# Altium PCB PCB.PcbDoc
Units mm, origin at the board's own origin, x right, y up, seen from the top; angles counter-clockwise.
Board outline 91.28 x 24.62 mm, 2 copper layers (Top Layer, Bottom Layer), stack 1.671 mm thick; 2 components, 67 nets, 174 pads, 0 vias.
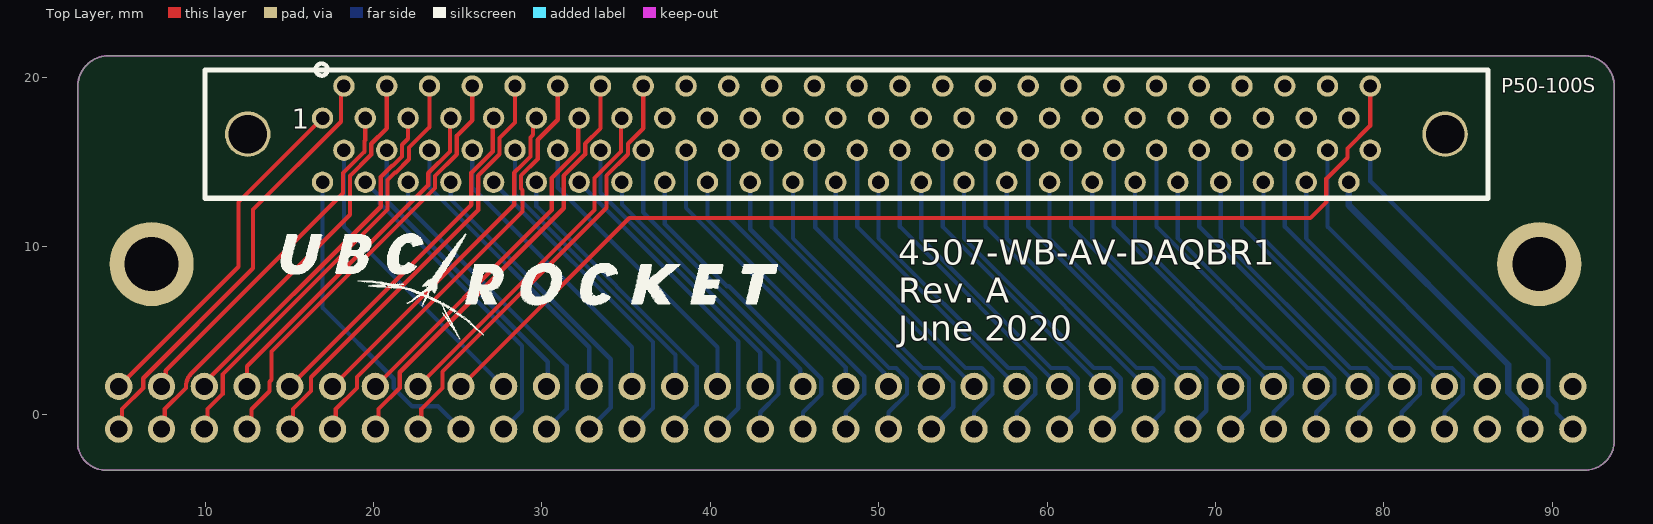
[diagram p0: Top Layer view]
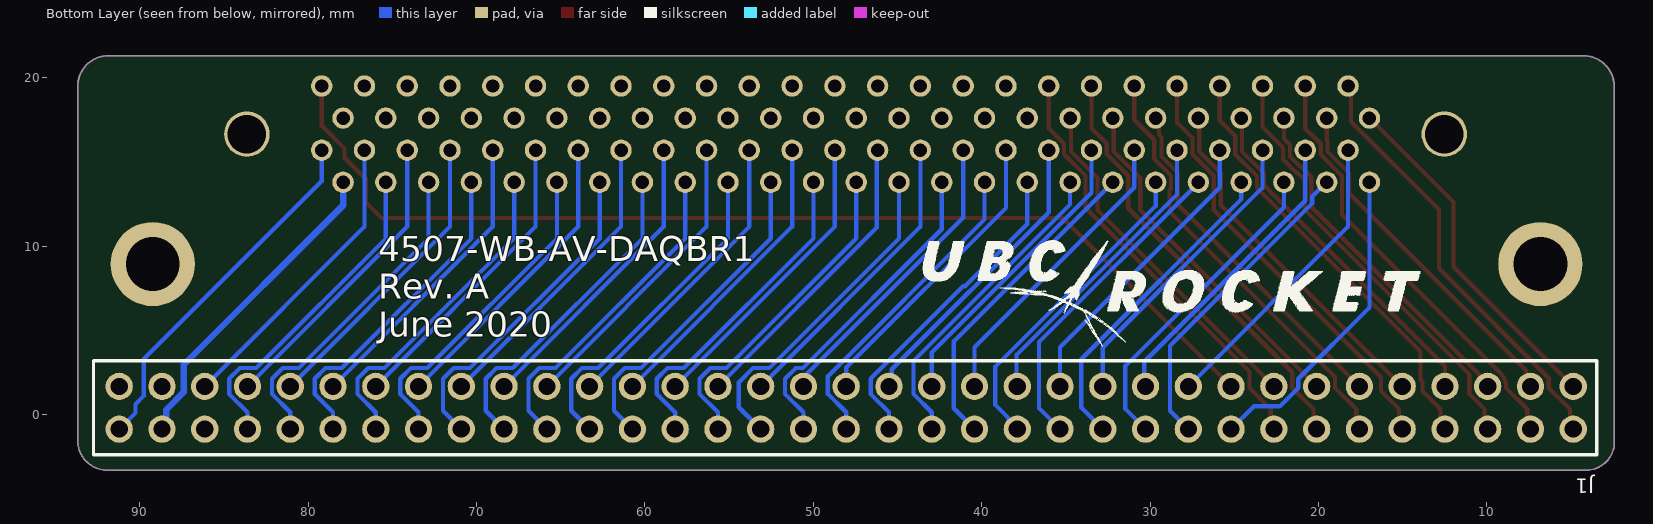
[diagram p1: Bottom Layer view, seen from below]

## Layer stack, top to bottom
Top Solder: solder mask 0.0102, Solder Resist, Dk 3.5
Top Layer: signal copper 0.0356
Dielectric 1: dielectric 1.6, FR-4, Dk 4.8
Bottom Layer: signal copper 0.0356
Bottom Solder: solder mask 0.0102, Solder Resist, Dk 3.5

## Board outline
4.094,-3.293 91.937,-3.293 ccw(c91.937,-1.532) 93.698,-1.532 93.698,19.484 ccw(c91.855,19.484) 91.855,21.327 4.28,21.327 ccw(c4.28,19.469) 2.422,19.469 2.422,-1.621 ccw(c4.094,-1.621)

## Design rules (kind name [scope] priority, off if disabled: settings)
Clearance [All] p1: gap=0.152 ignorepadtopadclearanceinfootprint=FALSE except(0: Arc-Hole Track-Hole SMDPad-Hole THPad-Hole Via-Hole Fill-Hole Poly-Hole Region-Hole Text-Hole)
ComponentClearance [All] p1: gap=0 collisioncheckmode=3 verticalgap=0.003 showdistances=FALSE
HoleSize [All] p1: absolutevalues=TRUE maxlimit=25.4 minlimit=0.025 maxpercent=80.000 minpercent=20.000
MinimumSolderMaskSliver [All] p1: minsoldermaskwidth=0.025
PolygonConnect [All] p1: connectstyle=Direct reliefconductorwidth=0.254 reliefentries=4 polygonreliefangle="90 Angle" airgapwidth=0.254
RoomDefinition BMS_REV_A1 [InComponentClass('BMS_REV_A1')] p1: confinementstyle=ConfineIn formatcopy=TRUE lockcomponents=FALSE outline -54.699,-63.136 47.701,-63.136 47.701,5.363 -54.699,5.363
RoutingVias [All] p1: holewidth=0.2 width=0.505 viastyle="Through Hole" minholewidth=0.2 minwidth=0.505 maxholewidth=0.711 maxwidth=1.27
SilkToSilkClearance [All] p1: silktosilkclearance=0.025
SilkToSolderMaskClearance [IsPad] p1: minsilkscreentomaskgap=0.025 clearancetoexposedcopper=TRUE
SolderMaskExpansion [All] p1: expansion=0.102 istentingtop=FALSE
Width [All] p1: maxlimit=5.08 minlimit=0.254 preferedwidth=0.305
25 further rules are at their usual default settings.

## Components (designator, comment, footprint, x,y, rotation, side; value= is the part's Value field where it differs from the comment)
J1 "SAMTEC-HTSW-135-07-X-DJ" HTSW-135-07-G-D 48.047,0.411 r0 bottom locked
P50-100S "P50-100S" P50-100S-R1-EA 48.086,16.663 r0 top locked

## Footprints (in the part's own frame and the unit in brackets; to place one, negate y for a bottom-side part, rotate by r counter-clockwise, add the part's x,y. Pads: shape width x height; smd on the part's side, far side on the other; paste and mask are expansions set on the pad)
HTSW-135-07-G-D [mm]
  round 1.62 hole 1.02: 1(-43.18,-1.27) 2(-43.18,1.27) 3(-40.64,-1.27) 4(-40.64,1.27) 5(-38.1,-1.27) 6(-38.1,1.27) 7(-35.56,-1.27) 8(-35.56,1.27) 9(-33.02,-1.27) 10(-33.02,1.27) 11(-30.48,-1.27) 12(-30.48,1.27) 13(-27.94,-1.27) 14(-27.94,1.27) 15(-25.4,-1.27) 16(-25.4,1.27) 17(-22.86,-1.27) 18(-22.86,1.27) 19(-20.32,-1.27) 20(-20.32,1.27) 21(-17.78,-1.27) 22(-17.78,1.27) 23(-15.24,-1.27) 24(-15.24,1.27) 25(-12.7,-1.27) 26(-12.7,1.27) 27(-10.16,-1.27) 28(-10.16,1.27) 29(-7.62,-1.27) 30(-7.62,1.27) 31(-5.08,-1.27) 32(-5.08,1.27) 33(-2.54,-1.27) 34(-2.54,1.27) 35(0,-1.27) 36(0,1.27) 37(2.54,-1.27) 38(2.54,1.27) 39(5.08,-1.27) 40(5.08,1.27) 41(7.62,-1.27) 42(7.62,1.27) 43(10.16,-1.27) 44(10.16,1.27) 45(12.7,-1.27) 46(12.7,1.27) 47(15.24,-1.27) 48(15.24,1.27) 49(17.78,-1.27) 50(17.78,1.27) 51(20.32,-1.27) 52(20.32,1.27) 53(22.86,-1.27) 54(22.86,1.27) 55(25.4,-1.27) 56(25.4,1.27) 57(27.94,-1.27) 58(27.94,1.27) 59(30.48,-1.27) 60(30.48,1.27) 61(33.02,-1.27) 62(33.02,1.27) 63(35.56,-1.27) 64(35.56,1.27) 65(38.1,-1.27) 66(38.1,1.27) 67(40.64,-1.27) 68(40.64,1.27) 69(43.18,-1.27) 70(43.18,1.27)
  silkscreen extent -44.58,-2.79 44.7,2.79, body extent -44.58,-2.51 44.32,2.51, height 7.89
P50-100S-R1-EA [mm]
  round 1.27 hole 0.8: 1(-31.115,0.953) 2(-29.845,2.858) 3(-28.575,0.953) 4(-27.305,2.858) 5(-26.035,0.953) 6(-24.765,2.858) 7(-23.495,0.953) 8(-22.225,2.858) 9(-20.955,0.953) 10(-19.685,2.858) 11(-18.415,0.953) 12(-17.145,2.858) 13(-15.875,0.953) 14(-14.605,2.858) 15(-13.335,0.953) 16(-12.065,2.858) 17(-10.795,0.953) 18(-9.525,2.858) 19(-8.255,0.953) 20(-6.985,2.858) 21(-5.715,0.953) 22(-4.445,2.858) 23(-3.175,0.953) 24(-1.905,2.858) 25(-0.635,0.953) 26(0.635,2.858) 27(1.905,0.953) 28(3.175,2.858) 29(4.445,0.953) 30(5.715,2.858) 31(6.985,0.953) 32(8.255,2.858) 33(9.525,0.953) 34(10.795,2.858) 35(12.065,0.953) 36(13.335,2.858) 37(14.605,0.953) 38(15.875,2.858) 39(17.145,0.953) 40(18.415,2.858) 41(19.685,0.953) 42(20.955,2.858) 43(22.225,0.953) 44(23.495,2.858) 45(24.765,0.953) 46(26.035,2.858) 47(27.305,0.953) 48(28.575,2.858) 49(29.845,0.953) 50(31.115,2.858) 51(-31.115,-2.857) 52(-29.845,-0.952) 53(-28.575,-2.857) 54(-27.305,-0.952) 55(-26.035,-2.857) 56(-24.765,-0.952) 57(-23.495,-2.857) 58(-22.225,-0.952) 59(-20.955,-2.857) 60(-19.685,-0.952) 61(-18.415,-2.857) 62(-17.145,-0.952) 63(-15.875,-2.857) 64(-14.605,-0.952) 65(-13.335,-2.857) 66(-12.065,-0.952) 67(-10.795,-2.857) 68(-9.525,-0.952) 69(-8.255,-2.857) 70(-6.985,-0.952) 71(-5.715,-2.857) 72(-4.445,-0.952) 73(-3.175,-2.857) 74(-1.905,-0.952) 75(-0.635,-2.857) 76(0.635,-0.952) 77(1.905,-2.857) 78(3.175,-0.952) 79(4.445,-2.857) 80(5.715,-0.952) 81(6.985,-2.857) 82(8.255,-0.952) 83(9.525,-2.857) 84(10.795,-0.952) 85(12.065,-2.857) 86(13.335,-0.952) 87(14.605,-2.857) 88(15.875,-0.952) 89(17.145,-2.857) 90(18.415,-0.952) 91(19.685,-2.857) 92(20.955,-0.952) 93(22.225,-2.857) 94(23.495,-0.952) 95(24.765,-2.857) 96(26.035,-0.952) 97(27.305,-2.857) 98(28.575,-0.952) 99(29.845,-2.857) 100(31.115,-0.952)
  round 2.7 hole 2.3: ""(-35.56,0) ""(35.56,0)
  silkscreen extent -38.1,-3.81 38.1,4.19, body extent -37.93,-3.5 38.3,3.5, height 10.71

## Free pads (board coordinates)
  round 5 hole 3.2: ""(6.817,8.948) ""(89.235,8.948)

## Nets (pads, with @x,y where several pads share a name; then routed paths per layer and width w, separated by ;. In a path a pad name is that pad's centre, name@x,y a point inside that pad or via, vN(x,y) a via of type N, cw(c..) or ccw(c..) an arc to the next point about the centre after c; other vN are vias at no path point)
+5V: J1.68 P50-100S.99 | length 19.1
  Bottom Layer w0.381: P50-100S.99 77.931,12.428 87.385,2.974 87.385,1.342 88.426,0.301 88.426,-0.598 J1.68
"Analog Ground 1": J1.2 P50-100S.2 | length 25.9
  Top Layer w0.254: J1.2 5.059,-0.667 5.059,0.332 6.318,1.591 6.318,2.168 12.844,8.695 12.844,12.182 18.065,17.403 18.065,19.345 P50-100S.2
"Analog Ground 2": J1.4 P50-100S.4 | length 25.9
  Top Layer w0.254: J1.4 7.599,-0.667 7.599,0.332 8.858,1.591 8.858,1.784 8.863,1.79 cw(c9.947,1.681) 9.177,2.451 18.596,11.871 18.596,14.185 19.866,15.455 19.866,16.09 20.781,17.004 P50-100S.4
"Analog Ground 3": J1.6 P50-100S.6 | length 25.9
  Top Layer w0.254: J1.6 10.139,-0.667 10.139,0.332 11.036,1.23 11.036,2.388 20.831,12.183 20.831,13.942 21.28,14.39 21.328,14.39 22.111,15.174 22.111,15.87 23.321,17.08 P50-100S.6
"Analog Ground 4": J1.8 P50-100S.8 | length 25.9
  Top Layer w0.254: J1.8 12.748,-0.598 12.748,0.327 13.816,1.394 13.816,1.949 13.938,2.071 13.938,3.754 23.647,13.463 23.647,14.17 24.946,15.469 24.946,16.566 25.861,17.481 P50-100S.8
"Analog Ground 5": J1.10 P50-100S.10 | length 25.9
  Top Layer w0.254: J1.10 15.219,-0.667 15.219,0.332 16.287,1.4 16.287,2.228 26.216,12.157 26.216,14.199 27.486,15.469 27.486,16.436 28.401,17.351 P50-100S.10
"Analog Ground 6": J1.12 P50-100S.12 | length 26
  Top Layer w0.254: J1.12 17.759,-0.667 17.759,0.332 19.018,1.591 19.018,2.233 28.848,12.064 28.848,13.335 28.756,13.427 28.756,14.199 29.75,15.193 29.75,16.327 30.941,17.518 P50-100S.12
"Analog Ground 7": J1.14 P50-100S.14 | length 25.9
  Top Layer w0.254: J1.14 20.299,-0.667 20.299,0.332 21.558,1.591 21.558,2.522 31.296,12.261 31.296,14.199 32.566,15.469 32.566,16.09 33.481,17.004 P50-100S.14
"Analog Ground 8": J1.16 P50-100S.16 | length 25.9
  Top Layer w0.254: J1.16 22.839,-0.667 22.839,0.332 24.098,1.591 24.098,2.557 33.836,12.295 33.836,14.199 35.106,15.469 35.106,16.09 36.021,17.004 P50-100S.16
"Digital Ground 1": J1.17 P50-100S.50 | length 63.9
  Top Layer w0.254: J1.17 35.183,11.677 75.641,11.677 76.59,12.626 76.59,14.013 77.842,15.265 77.842,15.809 79.201,17.168 P50-100S.50
"Digital Ground 2": J1.70 P50-100S.100 | length 21.6
  Bottom Layer w0.254: P50-100S.100 79.201,13.872 89.776,3.297 89.776,1.108 90.262,0.622 90.262,0.106 J1.70
"FIRSTPORTA Bit 0": J1.49 P50-100S.82 | length 18
  Bottom Layer w0.254: P50-100S.82 56.341,11.167 J1.49
"FIRSTPORTA Bit 1": J1.48 P50-100S.81 | length 19.5
  Bottom Layer w0.254: P50-100S.81 55.071,10.472 62.772,2.77 63.738,2.77 64.376,2.132 64.376,0.23 J1.48
"FIRSTPORTA Bit 2": J1.47 P50-100S.80 | length 18
  Bottom Layer w0.254: P50-100S.80 53.801,11.167 J1.47
"FIRSTPORTA Bit 3": J1.46 P50-100S.79 | length 19.5
  Bottom Layer w0.254: P50-100S.79 52.531,10.472 60.232,2.77 61.198,2.77 61.836,2.132 61.836,0.23 J1.46
"FIRSTPORTA Bit 4": J1.45 P50-100S.78 | length 18
  Bottom Layer w0.254: P50-100S.78 51.261,11.167 J1.45
"FIRSTPORTA Bit 5": J1.44 P50-100S.77 | length 19.5
  Bottom Layer w0.254: P50-100S.77 49.991,10.472 57.692,2.77 58.658,2.77 59.296,2.132 59.296,1.23 58.207,0.14 J1.44
"FIRSTPORTA Bit 6": J1.43 P50-100S.76 | length 18
  Bottom Layer w0.254: P50-100S.76 48.721,11.167 J1.43
"FIRSTPORTA Bit 7": J1.42 P50-100S.75 | length 19.5
  Bottom Layer w0.254: P50-100S.75 47.451,10.472 55.152,2.77 56.118,2.77 56.756,2.132 56.756,1.23 55.667,0.14 J1.42
"FIRSTPORTB Bit 0": J1.57 P50-100S.90 | length 18
  Bottom Layer w0.254: P50-100S.90 66.501,11.167 J1.57
"FIRSTPORTB Bit 1": J1.56 P50-100S.89 | length 19.5
  Bottom Layer w0.254: P50-100S.89 65.231,10.472 72.932,2.77 73.898,2.77 74.536,2.132 74.536,1.23 73.447,0.14 J1.56
"FIRSTPORTB Bit 2": J1.55 P50-100S.88 | length 18
  Bottom Layer w0.254: P50-100S.88 63.961,11.167 J1.55
"FIRSTPORTB Bit 3": J1.54 P50-100S.87 | length 19.5
  Bottom Layer w0.254: P50-100S.87 62.691,10.472 70.392,2.77 71.358,2.77 71.996,2.132 71.996,0.23 J1.54
"FIRSTPORTB Bit 4": J1.53 P50-100S.86 | length 18
  Bottom Layer w0.254: P50-100S.86 61.421,11.167 J1.53
"FIRSTPORTB Bit 5": J1.52 P50-100S.85 | length 19.5
  Bottom Layer w0.254: P50-100S.85 60.151,10.472 67.852,2.77 68.818,2.77 69.456,2.132 69.456,0.23 J1.52
"FIRSTPORTB Bit 6": J1.51 P50-100S.84 | length 18
  Bottom Layer w0.254: P50-100S.84 58.881,11.167 J1.51
"FIRSTPORTB Bit 7": J1.50 P50-100S.83 | length 19.5
  Bottom Layer w0.254: P50-100S.83 57.611,10.472 65.312,2.77 66.278,2.77 66.916,2.132 66.916,0.23 J1.50
"FIRSTPORTC Bit 0": J1.65 P50-100S.98 | length 18
  Bottom Layer w0.254: P50-100S.98 76.661,11.167 J1.65
"FIRSTPORTC Bit 1": J1.64 P50-100S.97 | length 19.5
  Bottom Layer w0.254: P50-100S.97 75.391,10.472 83.092,2.77 84.058,2.77 84.696,2.132 84.696,1.23 83.607,0.14 J1.64
"FIRSTPORTC Bit 2": J1.63 P50-100S.96 | length 18
  Bottom Layer w0.254: P50-100S.96 74.121,11.167 J1.63
"FIRSTPORTC Bit 3": J1.62 P50-100S.95 | length 19.5
  Bottom Layer w0.254: P50-100S.95 72.851,10.472 80.552,2.77 81.518,2.77 82.156,2.132 82.156,1.23 81.067,0.14 J1.62
"FIRSTPORTC Bit 4": J1.61 P50-100S.94 | length 18
  Bottom Layer w0.254: P50-100S.94 71.581,11.167 J1.61
"FIRSTPORTC Bit 5": J1.60 P50-100S.93 | length 19.5
  Bottom Layer w0.254: P50-100S.93 70.311,10.472 78.012,2.77 78.978,2.77 79.616,2.132 79.616,1.23 78.527,0.14 J1.60
"FIRSTPORTC Bit 6": J1.59 P50-100S.92 | length 18
  Bottom Layer w0.254: P50-100S.92 69.041,11.167 J1.59
"FIRSTPORTC Bit 7": J1.58 P50-100S.91 | length 19.5
  Bottom Layer w0.254: P50-100S.91 67.771,10.472 75.472,2.77 76.438,2.77 77.076,2.132 77.076,1.23 75.987,0.14 J1.58
"SECONDPORTA Bit 0": J1.25 P50-100S.58 | length 18
  Bottom Layer w0.254: P50-100S.58 25.861,13.487 35.347,4 J1.25
"SECONDPORTA Bit 1": J1.24 P50-100S.57 | length 19.1
  Bottom Layer w0.254: P50-100S.57 24.592,13.805 24.592,12.79 34.09,3.292 34.09,0.424 J1.24
"SECONDPORTA Bit 2": J1.23 P50-100S.56 | length 18
  Bottom Layer w0.254: P50-100S.56 23.321,13.487 32.807,4 J1.23
"SECONDPORTA Bit 3": J1.22 P50-100S.55 | length 19.1
  Bottom Layer w0.254: P50-100S.55 22.051,12.317 31.468,2.9 31.468,0.342 J1.22
"SECONDPORTA Bit 4": J1.21 P50-100S.54 | length 18
  Bottom Layer w0.254: P50-100S.54 20.781,12.707 30.349,3.139 30.349,1.763 J1.21
"SECONDPORTA Bit 5": J1.20 P50-100S.53 | length 19
  Bottom Layer w0.254: P50-100S.53 20.374,12.942 20.374,12.539 28.816,4.097 28.816,0.23 J1.20
"SECONDPORTA Bit 6": J1.19 P50-100S.52 | length 18
  Bottom Layer w0.254: P50-100S.52 18.241,11.167 J1.19
"SECONDPORTA Bit 7": J1.18 P50-100S.51 | length 19
  Bottom Layer w0.254: P50-100S.51 16.971,6.358 21.196,2.132 21.196,1.591 22.291,0.497 23.831,0.497 J1.18
"SECONDPORTB Bit 0": J1.33 P50-100S.66 | length 18
  Bottom Layer w0.254: P50-100S.66 36.021,12.016 45.343,2.694 45.343,1.845 J1.33
"SECONDPORTB Bit 1": J1.32 P50-100S.65 | length 19
  Bottom Layer w0.254: P50-100S.65 34.751,12.485 44.056,3.179 44.056,1.23 42.967,0.14 J1.32
"SECONDPORTB Bit 2": J1.31 P50-100S.64 | length 18
  Bottom Layer w0.254: P50-100S.64 33.481,13.18 42.967,3.694 J1.31
"SECONDPORTB Bit 3": J1.30 P50-100S.63 | length 19.1
  Bottom Layer w0.254: P50-100S.63 41.663,4.354 41.663,0.377 J1.30
"SECONDPORTB Bit 4": J1.29 P50-100S.62 | length 18
  Bottom Layer w0.254: P50-100S.62 30.941,13.487 40.427,4 J1.29
"SECONDPORTB Bit 5": J1.28 P50-100S.61 | length 19.1
  Bottom Layer w0.254: P50-100S.61 29.671,12.385 39.188,2.868 39.188,0.578 37.887,-0.723 J1.28
"SECONDPORTB Bit 6": J1.27 P50-100S.60 | length 18
  Bottom Layer w0.254: P50-100S.60 28.401,13.08 37.929,3.552 37.929,1.723 J1.27
"SECONDPORTB Bit 7": J1.26 P50-100S.59 | length 19.1
  Bottom Layer w0.254: P50-100S.59 27.131,13.776 36.595,4.311 36.595,0.389 J1.26
"SECONDPORTC Bit 0": J1.41 P50-100S.74 | length 18
  Bottom Layer w0.254: P50-100S.74 46.231,15.66 46.231,11.117 J1.41
"SECONDPORTC Bit 1": J1.40 P50-100S.73 | length 19.7
  Bottom Layer w0.254: P50-100S.73 44.911,10.472 52.612,2.77 53.578,2.77 54.428,1.921 54.428,0.442 J1.40
"SECONDPORTC Bit 2": J1.39 P50-100S.72 | length 18
  Bottom Layer w0.254: P50-100S.72 43.641,11.167 J1.39
"SECONDPORTC Bit 3": J1.38 P50-100S.71 | length 19.2
  Bottom Layer w0.254: P50-100S.71 42.371,11.018 50.618,2.77 51.038,2.77 51.676,2.132 51.676,1.23 50.587,0.14 J1.38
"SECONDPORTC Bit 4": J1.37 P50-100S.70 | length 18
  Bottom Layer w0.254: P50-100S.70 41.101,11.713 50.326,2.488 50.326,1.942 J1.37
"SECONDPORTC Bit 5": J1.36 P50-100S.69 | length 19
  Bottom Layer w0.254: P50-100S.69 39.831,11.589 49.136,2.283 49.136,1.23 48.047,0.14 J1.36
"SECONDPORTC Bit 6": J1.35 P50-100S.68 | length 18
  Bottom Layer w0.254: P50-100S.68 38.561,12.284 48.047,2.798 J1.35
"SECONDPORTC Bit 7": J1.34 P50-100S.67 | length 19
  Bottom Layer w0.254: P50-100S.67 37.291,11.321 40.976,7.636 41.093,7.636 46.596,2.132 46.596,1.23 45.507,0.14 J1.34
"Vout 0": J1.1 P50-100S.1 | length 20.9
  Top Layer w0.254: J1.1 11.977,8.791 11.977,12.622 P50-100S.1
"Vout 1": J1.3 P50-100S.3 | length 20.9
  Top Layer w0.254: J1.3 7.651,1.925 7.651,2.614 18.19,13.153 18.19,13.259 18.19,14.353 19.46,15.623 19.46,16.258 19.511,16.309 P50-100S.3
"Vout 2": J1.5 P50-100S.5 | length 21
  Top Layer w0.254: J1.5 9.947,1.874 20.425,12.352 20.425,14.11 21.111,14.797 21.159,14.797 21.695,15.332 21.695,16.029 22.051,16.384 P50-100S.5
"Vout 3": J1.7 P50-100S.7 | length 20.9
  Top Layer w0.254: J1.7 12.487,2.878 23.241,13.632 23.241,14.338 24.54,15.637 24.54,17.565 P50-100S.7
"Vout 4": J1.9 P50-100S.9 | length 20.9
  Top Layer w0.254: J1.9 25.81,12.464 25.81,14.367 27.08,15.637 27.08,17.565 P50-100S.9
"Vout 5": J1.11 P50-100S.11 | length 20.9
  Top Layer w0.254: J1.11 28.35,12.464 28.35,14.367 28.84,14.857 29.315,15.332 29.315,16.467 29.476,16.628 29.476,17.422 P50-100S.11
"Vout 6": J1.13 P50-100S.13 | length 20.9
  Top Layer w0.254: J1.13 30.585,12.159 30.585,14.062 32.16,15.637 32.16,17.565 P50-100S.13
"Vout 7": J1.15 P50-100S.15 | length 20.9
  Top Layer w0.254: J1.15 33.125,12.159 33.125,14.062 34.7,15.637 34.7,17.565 P50-100S.15
pads on no net: J1.66 J1.67 J1.69 P50-100S. P50-100S.17 P50-100S.18 P50-100S.19 P50-100S.20 P50-100S.21 P50-100S.22 P50-100S.23 P50-100S.24 P50-100S.25 P50-100S.26 P50-100S.27 P50-100S.28 P50-100S.29 P50-100S.30 P50-100S.31 P50-100S.32 P50-100S.33 P50-100S.34 P50-100S.35 P50-100S.36 P50-100S.37 P50-100S.38 P50-100S.39 P50-100S.40 P50-100S.41 P50-100S.42 P50-100S.43 P50-100S.44 P50-100S.45 P50-100S.46 P50-100S.47 P50-100S.48 P50-100S.49

## Keep-outs
Keep-Out Layer:
  the board outline again, w0.1

## Silkscreen, mask and mechanical layers (free items; w line width, h text height)
Top Overlay:
  drawing of 28 lines, arcs and shapes, not listed
  text "4507-WB-AV-DAQBR1 / Rev. A / June 2020" at 51.157,4.401 h1.5
Bottom Overlay:
  drawing of 28 lines, arcs and shapes, not listed
  text "4507-WB-AV-DAQBR1 / Rev. A / June 2020" at 75.835,4.624 h1.5

## Text inside footprints (layer, text, board x,y; h text height)
J1: Mechanical 40 "5.029" at -3.312,0.538 h0.39 r180; Mechanical 40 "2.540" at -1.445,0.538 h0.39 r180; Mechanical 40 "2.540" at 2.238,-3.526 h0.39 r180; Mechanical 40 "88.900" at 47.247,4.787 h0.39 r180; Mechanical 40 "86.360" at 47.247,-4.542 h0.39 r180
P50-100S: Top Overlay "1" at 15.139,16.99 h1.2